# Altium PCB tscnew-tr.PcbDoc
Units mm, origin at the board's own origin, x right, y up, seen from the top; angles counter-clockwise.
Board outline 151 x 86.38 mm, 2 copper layers (Top Layer, Bottom Layer); 20 components, 26 nets, 67 pads, 0 vias.
Unrouted connection lines stored in the file: 5.
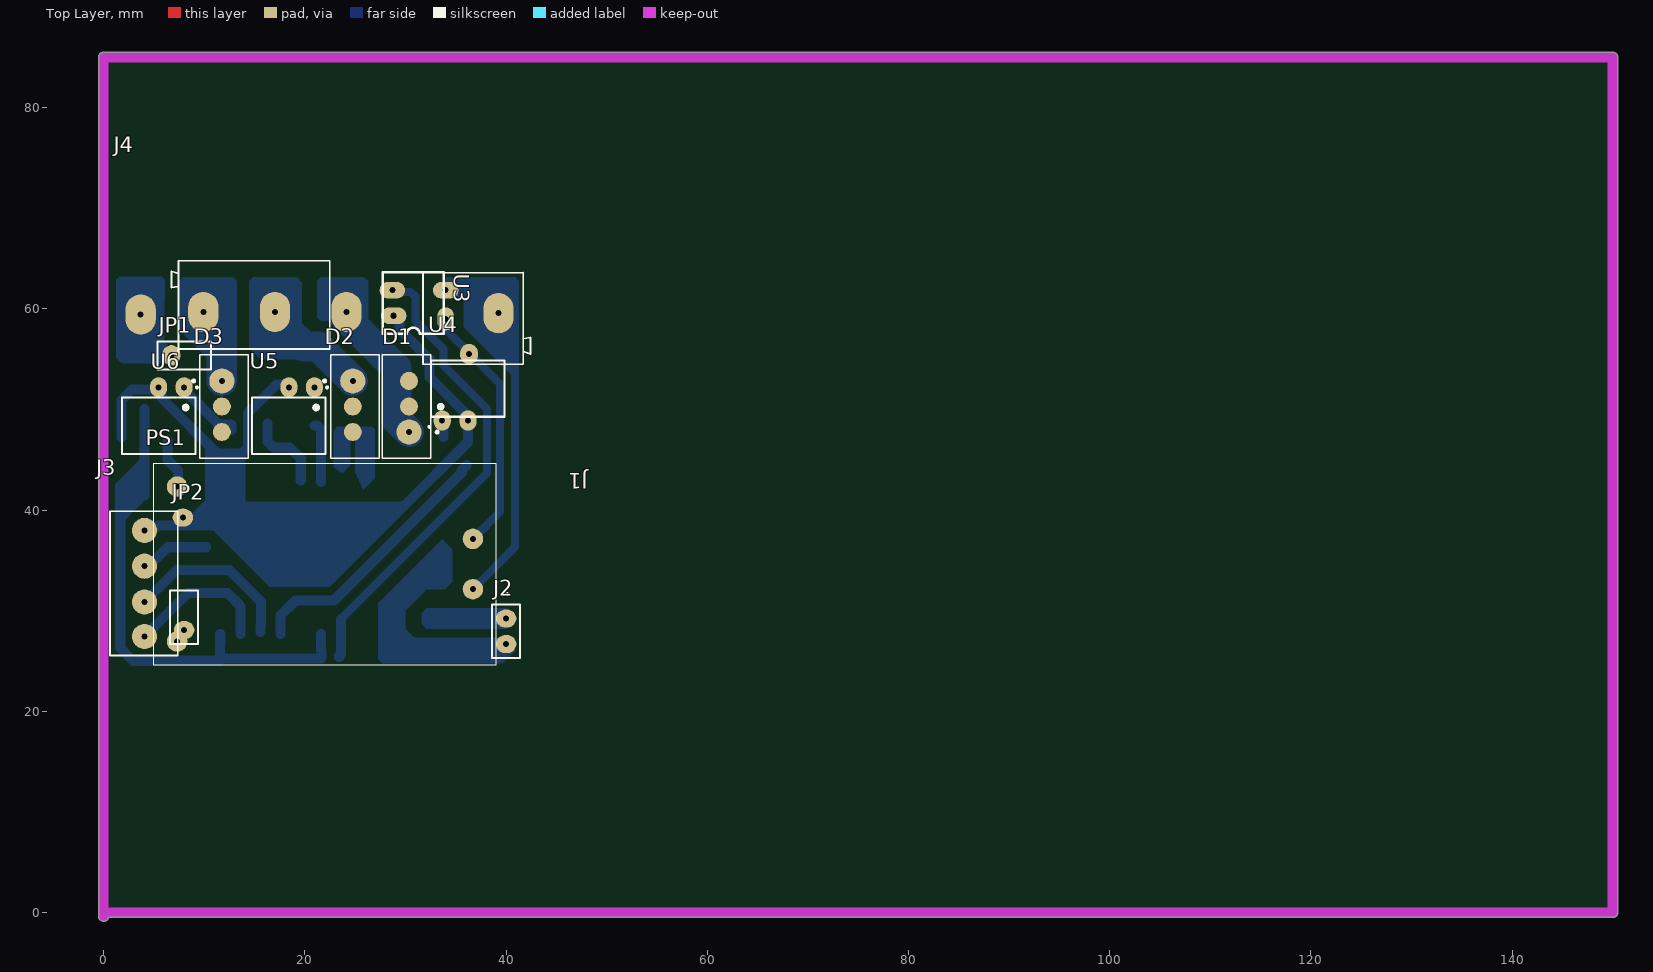
[diagram p0: Top Layer view]
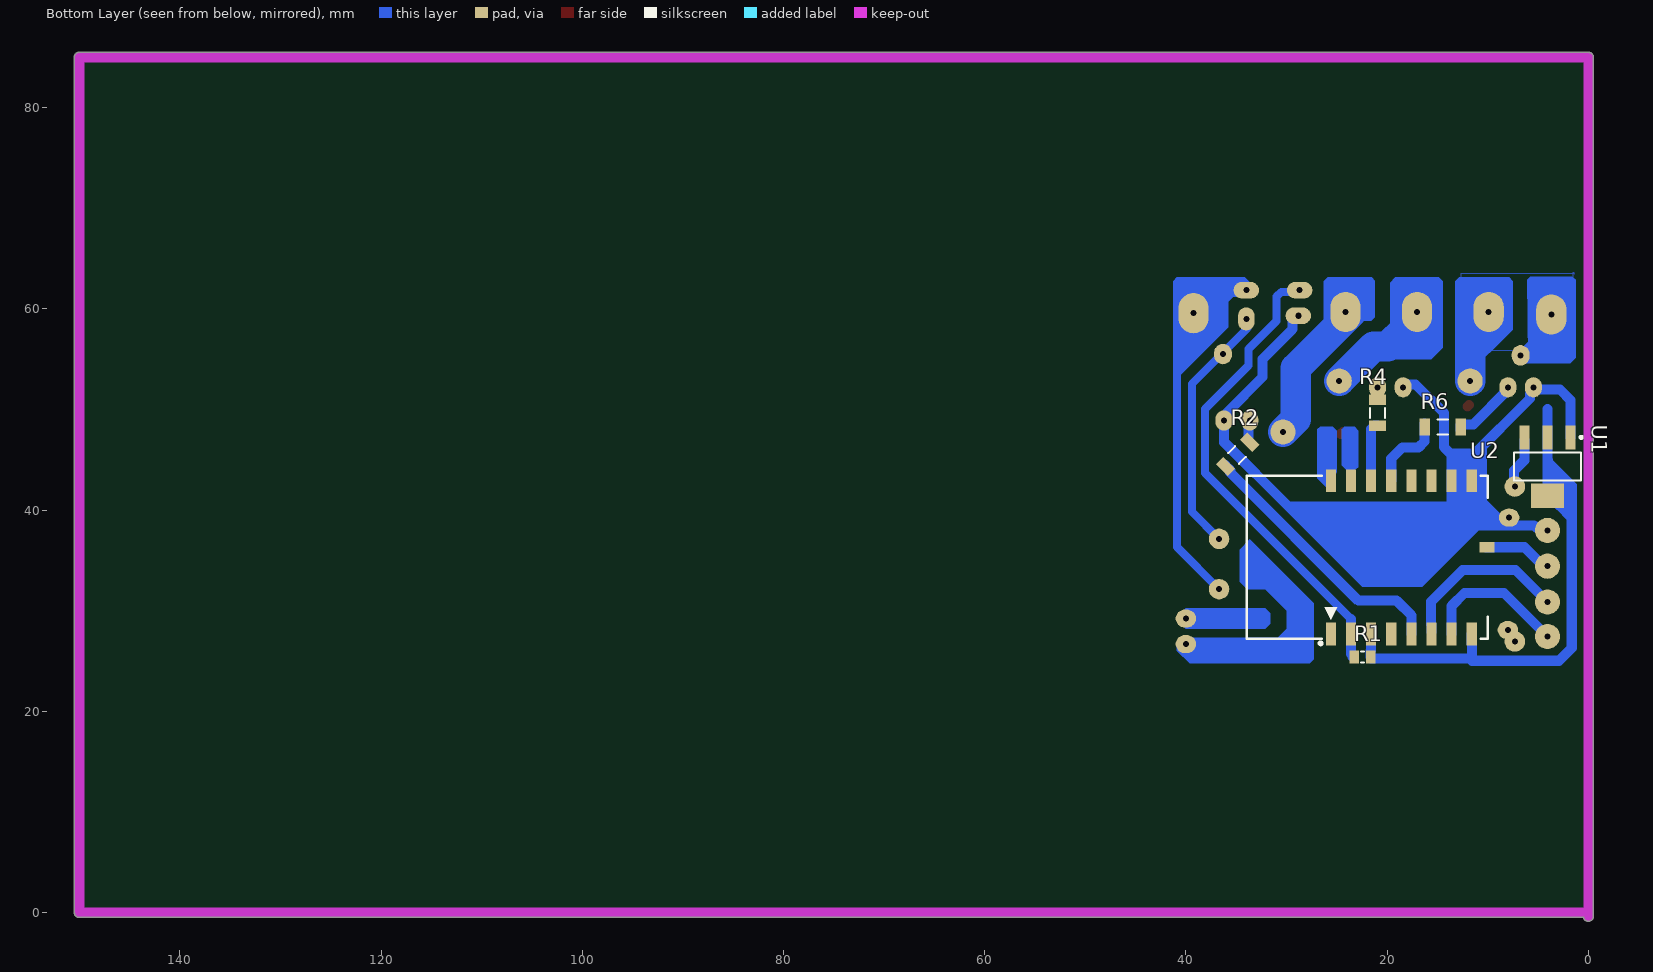
[diagram p1: Bottom Layer view, seen from below]
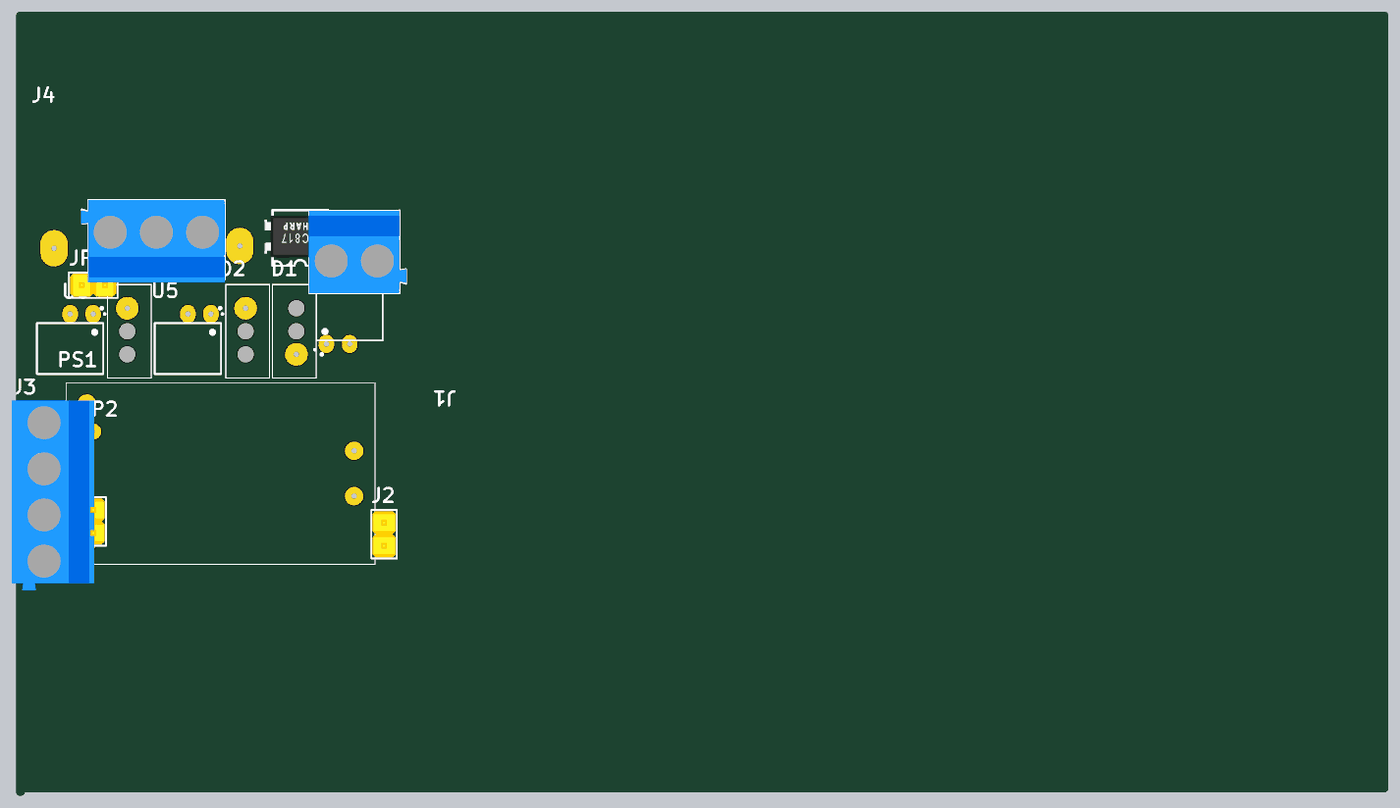
[diagram p2: 3D render of the assembled board from above, using the file's embedded part models]
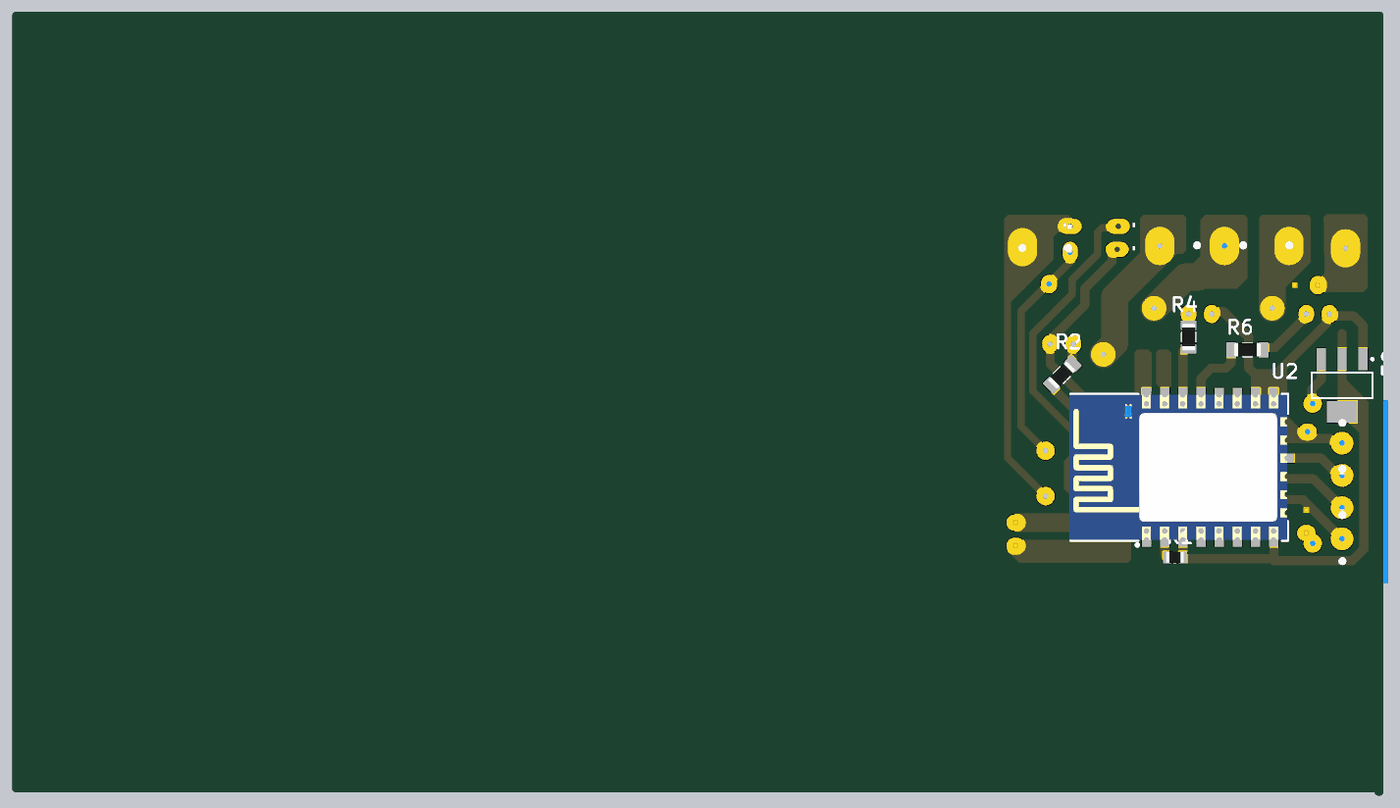
[diagram p3: 3D render of the assembled board from below, using the file's embedded part models]

## Layer stack, top to bottom
Top Solder: solder mask 0.0102, Solder Resist, Dk 3.5
Top Layer: signal copper 0.0356
Dielectric 1: dielectric 0.32, FR-4, Dk 4.8
Bottom Layer: signal copper 0.0356
Bottom Solder: solder mask 0.0102, Solder Resist, Dk 3.5

## Board outline
-0.5,-0.381 -0.5,85 cw(c0,85) 0,85.5 150,85.5 cw(c150,85) 150.5,85 150.5,0 cw(c150,0) 150,-0.5 0.486,-0.5 cw(c0,-0.381)

## Design rules (kind name [scope] priority, off if disabled: settings)
Clearance Clearance_1 [InPolygon] p1: gap=0.8 ignorepadtopadclearanceinfootprint=FALSE
Clearance [All] p2: gap=0.254 ignorepadtopadclearanceinfootprint=FALSE except(0: Arc-Hole Track-Hole SMDPad-Hole THPad-Hole Via-Hole Fill-Hole Poly-Hole Region-Hole Text-Hole)
PolygonConnect [All] p1: connectstyle=Relief reliefconductorwidth=0.254 reliefentries=4 polygonreliefangle="90 Angle" airgapwidth=0.254
RoomDefinition tscnew-tr [InComponentClass('tscnew-tr')] p1: confinementstyle=ConfineIn formatcopy=TRUE lockcomponents=FALSE outline 144.907,-4.953 247.904,-4.953 247.904,23.114 144.907,23.114
RoutingLayers [All] p1: top layer_v5=FALSE bottom layer_v5=TRUE
RoutingVias [All] p1: holewidth=0.711 width=2.5 viastyle="Through Hole" minholewidth=0.711 minwidth=1.27 maxholewidth=0.711 maxwidth=2
SolderMaskExpansion [All] p1: expansion=0.102 istentingtop=FALSE
Width [All] p1: maxlimit=3 minlimit=0.5 preferedwidth=1
29 further rules are at their usual default settings.

## Components (designator, comment, footprint, x,y, rotation, side; value= is the part's Value field where it differs from the comment)
D1 "BTA16-600CW3G" *TO254P1028X482X1968-3 30.353,47.752 r90 top
D2 "BTA16-600CW3G" *TO254P1028X482X1968-3 24.765,52.832 r270 top
D3 "BTA16-600CW3G" *TO254P1028X482X1968-3 11.747,52.832 r270 top
J1 "TBlock-2" "KF300-2 PIN" 39.243,59.563 r270 top
J2 "Header2X1" "Header 2X1"#1 40.005,27.94 r90 top
J3 "TBlock-4" "KF300-4 PIN" 4.064,25.019 r180 top
J4 "TBlock-3" "KF300-3 PIN" 9.906,59.69 r90 top
JP1 "Jumper" "Header 2X1"#2 8.001,55.372 r180 top
JP2 "Jumper" "Header 2X1"#3 8.001,29.337 r90 top
PS1 "HLK-PM01" HLKPM01 36.703,32.131 r180 top
R1 "10K" "RES 0805 (2012X06L)" 22.479,25.4 r0 bottom
R2 "10K" "RES 1206 (3216X08L)"#1 34.925,45.466 r135 bottom
R4 "10K" "RES 1206 (3216X08L)"#2 20.955,49.657 r90 bottom
R6 "10K" "RES 1206 (3216X08L)"#3 14.478,48.26 r180 bottom
U1 "LM1117MP-3.3" MP04A_N 4.064,44.323 r270 bottom
U2 "ESP_12_E" ESP_12_E 25.59,27.301 r90 bottom
U3 "PC817" DIP4 34.586,59.462 r180 top
U4 "K3021P" DIP762W50P254L730H410Q6#1 36.195,52.07 r90 top
U5 "K3021P" DIP762W50P254L730H410Q6#2 18.415,48.387 r270 top
U6 "K3021P" DIP762W50P254L730H410Q6#2 5.461,48.387 r270 top

## Footprints (in the part's own frame and the unit in brackets; to place one, negate y for a bottom-side part, rotate by r counter-clockwise, add the part's x,y. Pads: shape width x height; smd on the part's side, far side on the other; paste and mask are expansions set on the pad)
*TO254P1028X482X1968-3 [mm]
  round 2.5 hole 0.6: 1(0,0)
  round 1.79 smd: 2(2.54,0) 3(5.08,0)
  silkscreen extent -2.6,-2.9 7.68,2.64
DIP4 [mm]
  oval 1.651x2.3 hole 0.6: 1(0.586,0.462)
  oval 2.54x1.651 hole 0.6: 2(0.586,-2.387) 3(5.757,0.153) 4(5.884,-2.387)
  silkscreen extent 0.76,-4.19 6.86,1.96, body extent -0.13,-3.56 7.75,1.03, height 4.3
DIP762W50P254L730H410Q6#1 [mm]
  oval 2x1.7 hole 0.6: 1(-3.175,2.54) 2(-3.175,-0.024)
  silkscreen extent -3.9,-3.65 2.8,3.9
DIP762W50P254L730H410Q6#2 [mm]
  oval 2x1.7 hole 0.6: 1(-3.81,2.54) 2(-3.81,0)
  silkscreen extent -3.9,-3.65 2.8,3.9
ESP_12_E [mm] "ESP-12 Wi-Fi Module by AI-Thinker"
  rect 2.25x1 smd: 1(0.375,0) 2(0.375,-2) 3(0.375,-4) 4(0.375,-6) 5(0.375,-8) 6(0.375,-10) 7(0.375,-12) 8(0.375,-14) 15(15.625,-14) 16(15.625,-12) 17(15.625,-10) 18(15.625,-8) 19(15.625,-6) 20(15.625,-4) 21(15.625,-2) 22(15.625,0)
  rect 1x1.5 smd: 12(9,-15.5)
  silkscreen extent -0.7,-15.57 16.08,8.37, body extent 0,-15.49 16,8.51, height 2.75
"Header 2X1"#1 [mil]
  oval 70x80 hole 23.62: 1(-50,0) 2(50,0)
  silkscreen extent -105,-55 105,55, body extent -100,-50 100,50, height 374
"Header 2X1"#2 [mil]
  oval 70x80 hole 23.62: 1(-1115,-5) 2(50,0)
  silkscreen extent -105,-55 105,55, body extent -100,-50 100,50, height 374
"Header 2X1"#3 [mil]
  oval 70x80 hole 23.62: 1(-50,0) 2(390,5)
  silkscreen extent -105,-55 105,55, body extent -100,-50 100,50, height 374
HLKPM01 [mm]
  round 2.032 hole 0.6: 1(0,0) 2(0,-5) 3(29.4,5.2) 4(29.4,-10.2)
  silkscreen extent -3.5,-12.5 31.7,7.5
"KF300-2 PIN" [mm]
  oval 4x3 hole 0.6: 1(0,0) 2(0.127,-35.56)
  silkscreen extent -4.06,-7.49 5.08,3.18, body extent -3.99,-7.5 5.08,3.24, height 12.52
"KF300-3 PIN" [mm]
  oval 4x3 hole 0.6: 1(0,0) 2(0,-7.112) 3(0,-14.224)
  silkscreen extent -4.06,-12.57 5.08,3.18, body extent -4,-12.57 5.07,3.25, height 12.78
"KF300-4 PIN" [mm]
  round 2.5 hole 0.6: 1(0,-2.413) 2(0,-5.842) 3(0,-9.398) 4(0,-12.954)
  silkscreen extent -3.3,-14.86 3.43,-0.51, body extent -4.04,-17.65 5.03,3.25, height 12.52
MP04A_N [mm] "SOT223, 4-Leads, Body 6.5x3.5mm, Pitch 2.3mm, Lead Span 7mm, IPC Medium Density"
  rect 2.4x1 smd: 1(-2.9,2.3) 2(-2.9,0) 3(-2.9,-2.3)
  rect 2.4x3.3 smd: 4(2.9,0)
  silkscreen extent -3.02,-3.35 1.4,3.47, body extent -1.85,-3.35 1.85,3.35, height 1.8
"RES 0805 (2012X06L)" [mm] "Chip Resistor, 2-Leads, Body 2.0x1.3mm, IPC High Density _ (0.100 W)"
  rect 0.95x1.3 smd: 1(-0.838,0) 2(0.812,0)
  silkscreen extent -0.16,-0.55 0.14,0.55, body extent -1.03,-0.63 1,0.64, height 0.6
"RES 1206 (3216X08L)"#1 [mm] "Chip Resistor, 2-Leads, Body 3.2x1.6mm, IPC High Density _ (0.125 W)"
  rect 1.05x1.7 smd: 1(-1.616,0) 2(1.796,0)
  silkscreen extent -0.5,-0.75 0.5,0.75, body extent -1.52,-0.76 1.53,0.76, height 0.6
"RES 1206 (3216X08L)"#2 [mm] "Chip Resistor, 2-Leads, Body 3.2x1.6mm, IPC High Density _ (0.125 W)"
  rect 1.05x1.7 smd: 1(-1.295,0) 2(1.301,0)
  silkscreen extent -0.5,-0.75 0.5,0.75, body extent -1.52,-0.76 1.53,0.76, height 0.6
"RES 1206 (3216X08L)"#3 [mm] "Chip Resistor, 2-Leads, Body 3.2x1.6mm, IPC High Density _ (0.125 W)"
  rect 1.05x1.7 smd: 1(-1.778,0) 2(1.778,0)
  silkscreen extent -0.5,-0.75 0.5,0.75, body extent -1.52,-0.76 1.53,0.76, height 0.6

## Part data
D1 D2 D3: "TRIAC Standard 600V 16A Through Hole TO-220AB", Package="TO-220 ON Semiconductor", Arrow_Americas-Purchase-URL=https://snapeda.com/shop?store=Arrow+Americas&id=390940, Availability=Unavailable, DigiKey-Purchase-URL=https://snapeda.com/shop?store=DigiKey&id=390940, MF="Littelfuse Inc.", Mouser-Purchase-URL=https://snapeda.com/shop?store=Mouser&id=390940, MP=BTA16-600CW3G, Price=None, SnapEDA_Link=https://www.snapeda.com/parts/BTA16-600CW3G/Littelfuse%20Inc./view-part/390940/?ref=snap
PS1: "<b>Ultra-compact power module</b><p> Source: <a href=\"https://datasheet.lcsc.com/szlcsc/1906201102_HI-LINK-HLK-PM03_C209904.pdf\"> Datasheet </a>", Package="Package Analog Devices", Availability=Unavailable, MF=Hi-link, MP=hlk-pm01, Price=None, SnapEDA_Link=https://www.snapeda.com/parts/hlk-pm01/Hi-link/view-part/2875605/?ref=snap
R1 R2 R4 R6: library part Resistor, "Resistor", Power="1/4 W", Tolerance=5%
U1: "800mA Low-Dropout Linear Regulator", DigiKeyPartNumber=LM1117MP-3.3CT-ND, Manufacturer="National Semiconductor", PackageTopMarking=XYTT*N05A, PowerWise=N, Code_IPC=SOT223-4, Code_JEDEC=TO-261-AA, ComponentLink1Description="LM1117 Datasheet", ComponentLink1URL=http://www.national.com/ds/LM/LM1117.pdf, ComponentLink2Description="LM1117 Web Page", ComponentLink2URL=http://www.national.com/pf/LM/LM1117.html, ComponentLink3Description="MP04A Package Page", ComponentLink3URL=http://www.national.com/packaging/folders/mp04a.html, CompType="LDO IC", DatasheetVersion=Apr-2006, PackageDescription="Molded SOT-223, 6.50 x 3.56 x 1.6mm Body, 4 Lead, 2.3mm Pitch", PackageReference=MP04A, PackageVersion="revB, Apr-2003", PartNumber=LM1117MP-3.3, PinCount=4, Published=4-Dec-2008, Publisher="Altium Limited", RoHS=O
U2: "ESP-12 Wi-Fi Module by AI-Thinker", IC=ESP8266-EX, Vendor=Ai-thinker
U3: library part OPTCOUPLER_01, "4-Pin Phototransistor Optocoupler"
U4 U5 U6: "Optoisolator Triac Output 5300Vrms 1 Channel 6-DIP", Package="DIP-6 Vishay", Availability=Unavailable, DigiKey-Purchase-URL=https://snapeda.com/shop?store=DigiKey&id=291595, MF="Vishay Semiconductor", Mouser-Purchase-URL=https://snapeda.com/shop?store=Mouser&id=291595, MP=K3021P, Price=None, SnapEDA_Link=https://www.snapeda.com/parts/K3021P/Vishay%20Semiconductor%20Opto%20Division/view-part/291595/?ref=snap

## Nets (pads, with @x,y where several pads share a name; then routed paths per layer and width w, separated by ;. In a path a pad name is that pad's centre, name@x,y a point inside that pad or via, vN(x,y) a via of type N, cw(c..) or ccw(c..) an arc to the next point about the centre after c; other vN are vias at no path point)
btn: U2.18
faz: D1.2 D2.2 D3.2 J1.2 JP1.1 JP1.2 PS1.2 U3.1 | length 25.5
  Top Layer w1: D3.2@11.874,50.419 D3.2@12.002,50.292
  Bottom Layer w0.8: U3.1@33.874,59.09 33.874,58.074 36.225,55.723 39.402,52.546 39.402,39.83 PS1.2
GND: J3.4 JP2.1 JP2.2 PS1.3 U1.1 U2.15 U2.16 U3.3 U4.2 U5.2 U6.2 | length 76.4
  Bottom Layer w1: U1.1 1.764,50.913 2.819,51.968 5.232,51.968 U6.2 5.461,51.858 5.811,51.508 5.811,51.085 11.59,45.306 U2.15@11.59,43.551 ; J3.4 4.351,38.26 5.179,38.26 5.4,38.481 12.685,38.481 13.271,39.067 U2.16@13.271,43.043 ; U2.15 U2.15@11.59,43.551 ; U5.2@18.186,52.476 17.17,52.476 14.351,49.657 14.351,46.242 11.66,43.551 U2.15@11.59,43.551 ; 23.331,40.291 29.75,40.291 36.195,46.736 36.195,48.871 U4.2 36.219,49.234 35.869,49.584 35.869,49.729 32.385,53.213 32.385,54.991 29.398,57.978 29.398,59.008 U3.3@29.351,59.055
NetD1_3: D1.3
NetD2_3: D2.3 | length 0.3
  Top Layer w1: D2.3@24.4,47.752 D2.3@24.614,47.538
NetD3_3: D3.3
NetR1_2: R1.2 U2.2 U3.4 | length 46.7
  Bottom Layer w0.8: 23.59,29.178 38.1,43.688 38.1,50.038 33.782,54.356 33.782,56.007 30.988,58.801 30.988,61.218 30.519,61.686 U3.4@29.301,61.686
  Bottom Layer w1: R1.2@23.418,25.4 23.418,25.525 23.59,25.697 U2.2 23.59,29.178
NetR2_2: R2.2 U4.1 | length 1.7
  Bottom Layer w1: U4.1 33.789,48.761 R2.2@33.789,47.237
NetR3_1: 
NetR4_2: R4.2 U5.1
NetR5_1: 
NetR6_2: R6.2 U6.1 | length 6.9
  Bottom Layer w1: U6.1 8.001,51.943 11.444,48.5 12.675,48.5 12.725,48.45 R6.2@12.725,47.975
NetR7_1: 
nol: J1.1 PS1.1 U3.2 | length 34.3
  Bottom Layer w0.8: PS1.1 40.894,36.322 40.894,56.851 40.68,57.065 40.68,57.999 J1.1@40.259,58.42
  Bottom Layer w1: U3.2@33.528,61.849 37.211,61.849 37.338,61.976 ; J1.1@38.498,60.427 J1.1@39.017,59.908 ; J1.1@39.398,59.908 J1.1@40.434,58.872
o1: R6.1 U2.19 | length 8
  Bottom Layer w1: R6.1@16.281,48.61 16.281,46.814 16.867,46.228 18.478,46.228 19.59,45.116 U2.19
o2: R4.1 U2.20 | length 6
  Bottom Layer w1: R4.1@20.955,48.387 21.255,48.387 21.59,48.052 U2.20@21.59,42.805
o3: R2.1 U2.5 | length 26.7
  Bottom Layer w1: U2.5 17.59,29.528 19.05,30.988 22.86,30.988 35.596,43.724 35.596,43.942 36.068,44.415 R2.1@36.068,44.45
oo1: D3.1 J4.1 | length 8.7
  Bottom Layer w3: J4.1@9.779,60.706 9.906,60.579 9.906,57.658 11.747,55.816 D3.1
oo2: D2.1 J4.2 | length 12.3
  Bottom Layer w3: J4.2@16.51,60.833 16.51,60.333 18.161,58.682 18.161,58.018 19.918,56.261 21.336,56.261 D2.1
oo3: D1.1 J4.3 | length 15.9
  Bottom Layer w3: J4.3@23.622,60.833 23.622,59.563 29.083,54.102 29.083,49.022 D1.1
rst: U2.1
s1: J3.3 U2.12 | length 6.9
  Bottom Layer w1: J3.3 4.47,34.417 6.354,36.301 U2.12@10.16,36.301
s2: J3.2 U2.6 | length 17.2
  Bottom Layer w1: J3.2 7.239,34.036 12.492,34.036 15.621,30.907 15.621,28.625 15.59,28.594 U2.6@15.59,27.854
s3: J3.1 U2.7 | length 14
  Bottom Layer w1: J3.1@4.554,27.831 4.554,27.922 8.382,31.75 12.319,31.75 13.59,30.479 U2.7
vcc: PS1.4 U1.3 | length 5.1
  Bottom Layer w1: U1.3@6.364,46.969 6.364,44.944 7.374,43.934 7.374,42.402 PS1.4
vesp: R1.1 U1.2 U1.4 U2.3 U2.8 | length 49.8
  Bottom Layer w1: U1.4@3.527,41.082 2.914,40.469 2.877,40.469 1.651,39.243 1.651,26.289 2.921,25.019 11.557,25.019 11.557,26.725 11.59,26.758 U2.8 ; U1.4 U1.2 4.064,50.038 ; 11.557,25.25 21.616,25.25 21.616,25.375 R1.1 21.641,25.98 21.59,26.031 U2.3
pads on no net: J2.1 J2.2 U2.4 U2.17 U2.21 U2.22

## Polygon pours and split planes (outlines as drawn)
faz on Bottom Layer "NONET_L02_P003" (solid, shelved, pour order 3): 1.397,63.5 12.7,63.5 12.7,57.277 11.303,55.88 1.524,55.88 1.524,63.627
no net on Bottom Layer "NONET_L02_P001" (solid, pour order 1): 6.985,67.691

## Keep-outs
Keep-Out Layer:
  lines w1: 0,-0.381 0,85 150,85 150,0 0,0

## Other copper
Bottom Layer:
  region: -2.921,42.672
  region net vesp: 3.556,45.085 3.556,44.958 1.143,42.545 1.143,38.989 1.434,38.989 4.064,41.619 4.064,45.593
  region net faz: 5.842,56.896 6.985,55.753 6.985,54.61 4.572,54.61
  region net nol: 37.084,63.119 34.163,63.119 32.893,61.849 33.528,61.214 35.306,61.214 36.195,60.325 37.338,61.468
  region net faz: 5.779,63.183 6.096,62.865 5.97,55.119 5.461,54.61 1.778,54.61 1.27,55.118 1.27,62.865 1.587,63.183
  region: 25.019,43.815 25.019,47.879 25.4,48.26 26.67,48.26 26.924,48.006 26.924,43.18 25.781,42.037
  region: 22.86,44.231 22.86,47.879 23.241,48.26 24.257,48.26 24.511,48.006 24.511,44.45 23.735,43.674
  region: 27.305,30.734 27.305,25.146 27.686,24.765 35.56,24.765 35.56,25.654 35.687,25.781 34.163,27.305 30.861,27.305 29.972,28.194 29.972,29.972 32.131,32.131 33.909,32.131 34.671,32.893 34.671,36.068 33.655,37.084
  region net GND: 10.352,38.543 16.51,32.385 22.479,32.385 24.003,33.909 18.923,38.989 17.78,38.989
  region: 40.132,27.305 32.131,27.305 31.75,26.924 31.75,25.146 32.131,24.765 39.624,24.765 40.894,26.035 40.894,26.797
  region: 40.005,27.559
  region: 40.005,30.226 40.767,29.464 40.767,28.702 40.386,28.702 40.386,28.575 40.005,28.194 37.592,28.194 32.131,28.194 31.623,28.702 31.623,29.718 32.131,30.226
  region net oo3: 21.506,63.119 25.908,63.119 26.289,62.738 26.289,58.801 21.59,58.801 21.209,59.182 21.209,62.776
  region net oo2: 14.859,63.119 19.177,63.119 19.685,62.611 19.685,54.991 15.621,54.991 14.478,56.134 14.478,62.738
  region net oo1: 7.493,62.738 7.879,63.124 12.822,63.124 13.208,62.738 13.208,55.626 9.779,55.626 7.493,57.912
  region net nol: 43.434,60.452
  region net nol: 36.068,63.119 40.894,63.119 41.275,62.738 41.275,54.102 40.577,53.404 35.814,58.166 35.814,62.865
  pour cut-out: 4.191,61.595
  region net GND: 14.097,40.831 29.972,40.831 29.972,39.878 22.67,32.576 17.272,37.973 7.112,37.973 10.096,40.957 10.096,46.101 14.097,46.101
  region: 19.304,43.942
  region: 20.32,43.942
  region: 30.226,43.688

## Text inside footprints (layer, text, board x,y; h text height)
U2: Mechanical 13 "CUTOUT POLYGON" at 32.956,27.428 h0.25 r270; Mechanical 13 "ANTENNA AREA" at 33.464,27.428 h0.25 r270